# EAGLE board M3020A (EAGLE 6.6.0)
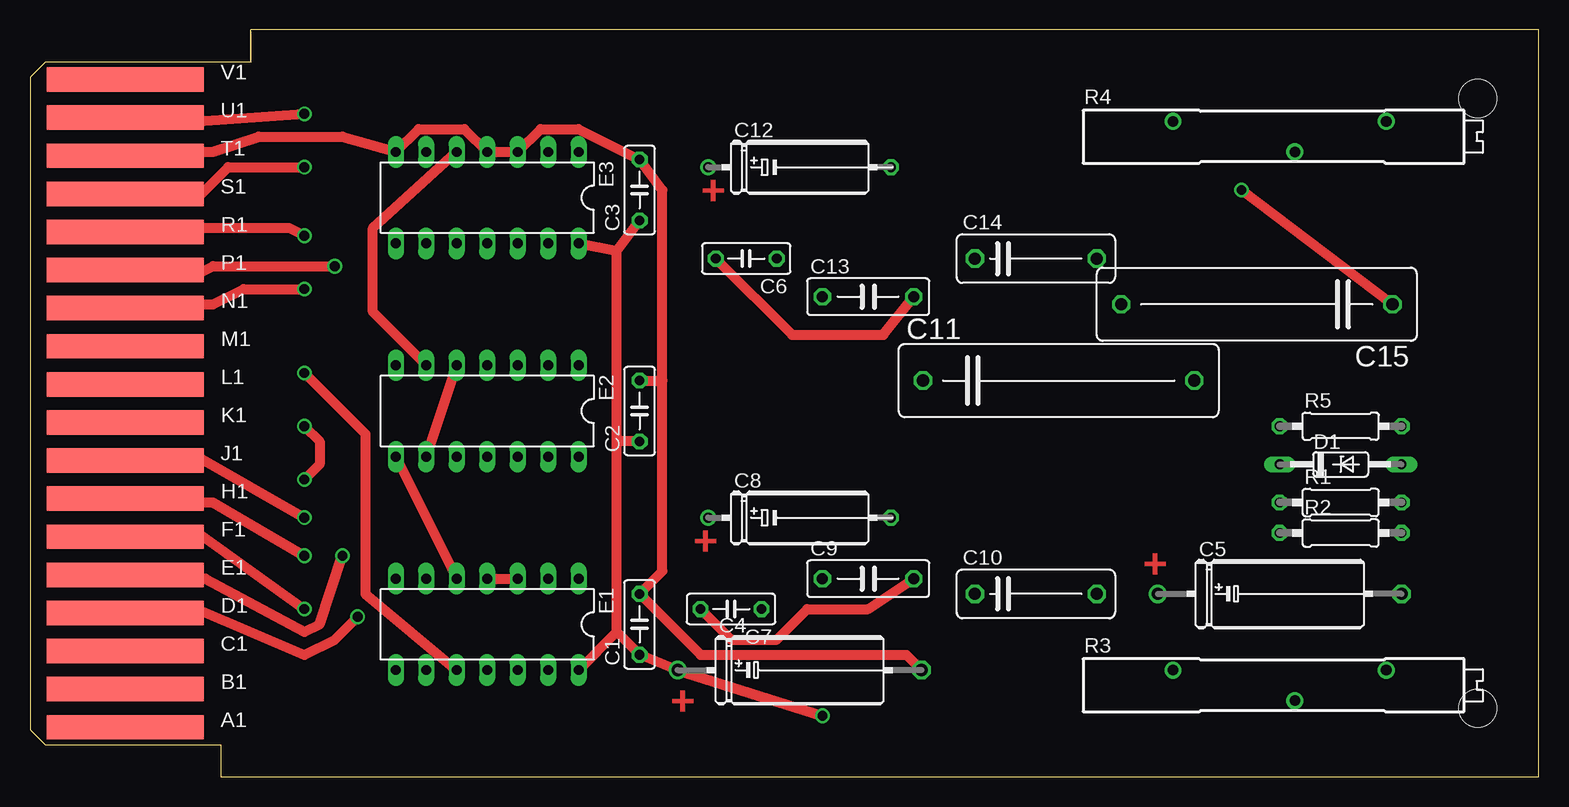
[diagram p0: board, top side]
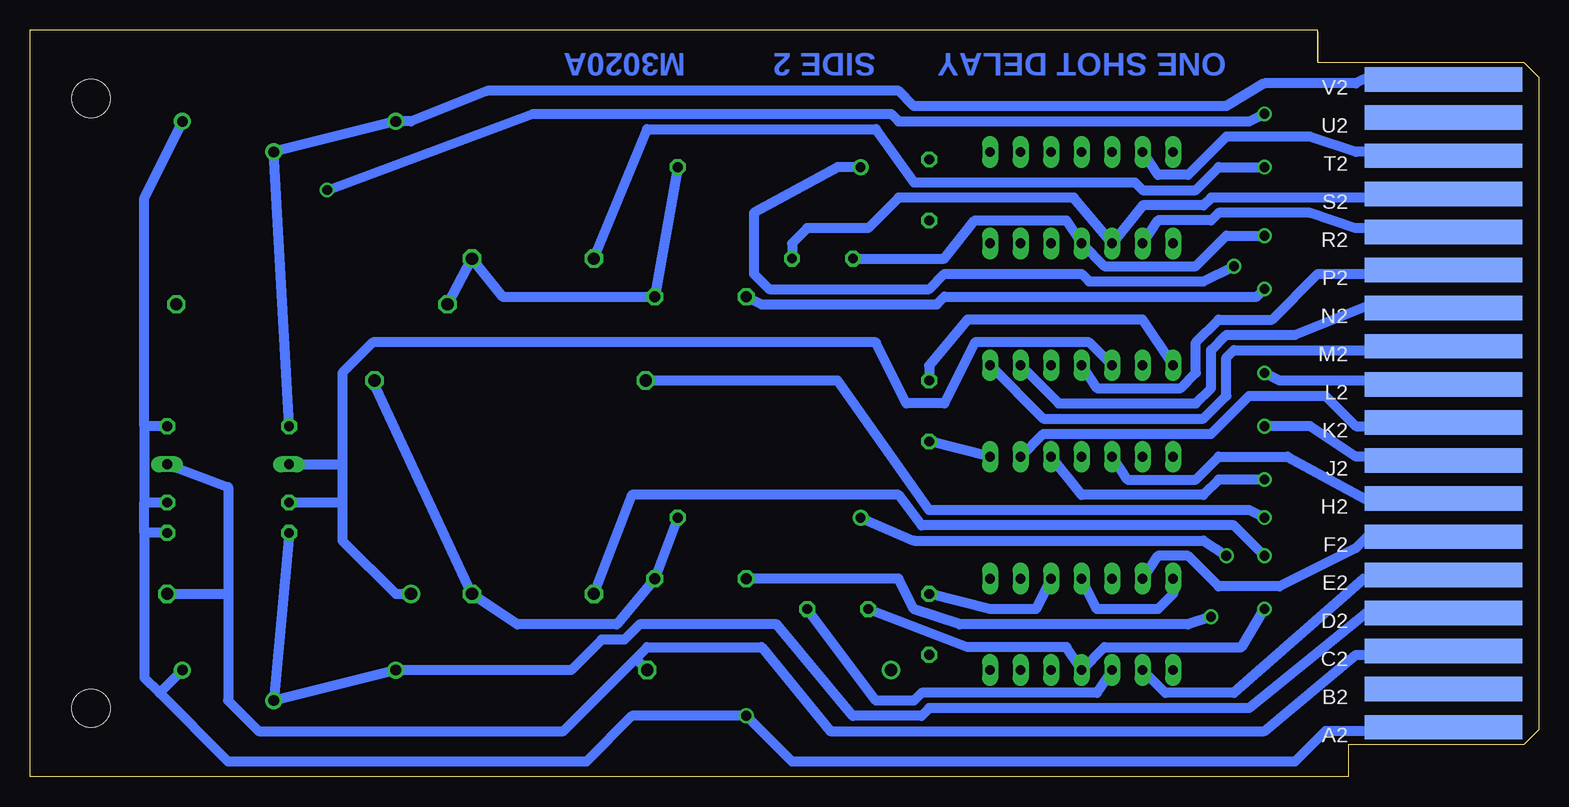
[diagram p1: board, bottom side, seen from below]

Size 125.73 x 62.23 mm. Coordinates in mm from the lower left corner, seen from the top.
Copper layers (1+16): Top 0.035mm / dielectric 1.5mm / Bottom 0.035mm
Design rules "16mils": minimum track width 16mil, minimum drill 32mil, track to track 15mil, track to pad 10mil, pad to pad 10mil, via to via 10mil, smd to smd 10mil, copper to edge 13mil, drill to drill 10mil, minimum pad ring 10mil, minimum via ring 8mil, stop-mask expansion 0mil, vias tented up to drill 0mil, thermal gap 10mil
Net classes: 0 default: width 0.813 mm

## Footprints (pad centres in the part's own frame; a part is rotated, then mirrored left to right if it is on the bottom)
C050-025X075 = drill 0.813 octagon: 1 -2.54,0; 2 2.54,0
E12-8 = drill 1.016: + -10.16,0 | drill 1.016 octagon: - 10.16,0
E15-5 = drill 0.813: + -7.62,0 | drill 0.813 octagon: - 7.62,0
C075-032X103 = drill 0.914 octagon: 1 -3.81,0; 2 3.81,0
C102-043X133 = drill 1.016 octagon: 1 -5.08,0; 2 5.08,0
C225-062X268 = drill 1.016 octagon: 1 -11.303,0; 2 11.303,0
DO35Z10 = drill 0.813 long: A 5.08,0; C -5.08,0
DIL14 = drill 0.813 long: 1 -7.62,-3.81; 2 -5.08,-3.81; 3 -2.54,-3.81; 4 0,-3.81; 5 2.54,-3.81; 6 5.08,-3.81; 7 7.62,-3.81; 8 7.62,3.81; 9 5.08,3.81; 10 2.54,3.81; 11 0,3.81; 12 -2.54,3.81; 13 -5.08,3.81; 14 -7.62,3.81
0207/10 = drill 0.813 octagon: 1 -5.08,0; 2 5.08,0
3006Y = drill 0.9: 1 -8.89,1.27; 2 1.27,-1.27; 3 8.89,1.27
SINGLE = hole 3.175: 120.65,56.515; 120.65,5.715
EDGE-CON2 = smd 13.106 x 2.032: A1 7.938,4.128; B1 7.938,7.303; C1 7.938,10.477; D1 7.938,13.652; E1 7.938,16.828; F1 7.938,20.003; H1 7.938,23.177; J1 7.938,26.352; K1 7.938,29.527; L1 7.938,32.703; M1 7.938,35.877; N1 7.938,39.053; P1 7.938,42.227; R1 7.938,45.403; S1 7.938,48.578; T1 7.938,51.752; U1 7.938,54.928; V1 7.938,58.102 | smd 13.106 x 2.032 bottom: A2 7.938,4.128; B2 7.938,7.303; C2 7.938,10.477; D2 7.938,13.652; E2 7.938,16.828; F2 7.938,20.003; H2 7.938,23.177; J2 7.938,26.352; K2 7.938,29.527; L2 7.938,32.703; M2 7.938,35.877; N2 7.938,39.053; P2 7.938,42.227; R2 7.938,45.403; S2 7.938,48.578; T2 7.938,51.752; U2 7.938,54.928; V2 7.938,58.102

## Placement (x,y rotation side)
C1  .01uF  [C050-025X075]  50.8,12.7 90 top
C2  .01uF  [C050-025X075]  50.8,30.48 90 top
C3  .01uF  [C050-025X075]  50.8,48.9 90 top
C4  47uF  [E12-8]  64.14,8.89 0 top
C5  6.8uF  [E12-8]  104.14,15.24 0 top
C6  22pF  [C050-025X075]  59.69,43.18 180 top
C7  22pF  [C050-025X075]  58.42,13.97 180 top
C8  .330uF  [E15-5]  64.14,21.59 0 top
C9  270pF  [C075-032X103]  69.85,16.51 0 top
C10  3300pF  [C102-043X133]  83.82,15.24 0 top
C11  .033uF  [C225-062X268]  85.73,33.02 0 top
C12  .330uF  [E15-5]  64.14,50.8 0 top
C13  270pF  [C075-032X103]  69.85,40.01 0 top
C14  3300pF  [C102-043X133]  83.82,43.18 0 top
C15  .033uF  [C225-062X268]  102.24,39.37 180 top
D1  1N746  [DO35Z10]  109.22,26.04 0 top
E1  74121N  [DIL14]  38.1,12.7 180 top
E2  7413N  [DIL14]  38.1,30.48 180 top
E3  74121N  [DIL14]  38.1,48.26 180 top
R1  180  [0207/10]  109.22,22.86 0 top
R2  220K  [0207/10]  109.22,20.32 0 top
R3  [3006Y]  104.14,7.62 0 top
R4  [3006Y]  104.14,53.34 0 top
R5  220K  [0207/10]  109.22,29.21 0 top
U$1  OUTLINE-SINGLE  [SINGLE]  0,0 0 top
U$2  [EDGE-CON2]  0,0 0 top

## Library data of the parts
C1-C3 C6 C7 C9-C11 C13-C15 R1 R2 R5 = rcl
C4 C5 C8 C12 R3 R4 U$1 U$2 = dec-con
D1 = diode
E1-E3 = 74xx-us

## Nets
+3V3: C5.+ D1.C E2.5 E2.9 R1.1
D1: C9.1 U$2.D1
D2: R2.1 R3.1 R3.2 U$2.D2
E1: C8.+ U$2.E1
E2: E1.9 U$2.E2
F1: C7.2 C8.- C9.2 C10.2 C11.2 E1.11 U$2.F1
F2: E1.6 U$2.F2
GND: C1.2 C2.2 C3.2 C4.- C5.- D1.A E1.3 E1.4 E1.7 E2.7 E3.3 E3.4 E3.7 U$2.C2 U$2.T1
H1: C10.1 U$2.H1
H2: E2.10 U$2.H2
J1: C11.1 U$2.J1
J2: E2.12 U$2.J2
K2: E2.13 U$2.K2
L2: C7.1 E1.10 U$2.L2
M2: E2.1 U$2.M2
N1: C13.1 U$2.N1
N2: E2.2 U$2.N2
N$4: E2.6 E3.5
N$5: E1.5 E2.8
P1: C12.+ U$2.P1
P2: E2.4 U$2.P2
R1: C6.2 C12.- C13.2 C14.2 C15.2 E3.11 U$2.R1
R2: E3.9 U$2.R2
S1: C14.1 U$2.S1
S2: C6.1 E3.10 U$2.S2
T2: E3.6 U$2.T2
U1: C15.1 U$2.U1
V2: R4.1 R4.2 R5.1 U$2.V2
VCC: C1.1 C2.1 C3.1 C4.+ E1.14 E2.14 E3.14 R1.2 R2.2 R3.3 R4.3 R5.2 U$2.A2

## Tracks (layer width: path | path; a pad name or v marks a point on that pad's centre or on a via)
+3V3
  Top 0.813: E2.9 E2.5
  Bottom 0.813: E2.5 37.47,36.2 46.99,36.2 49.53,31.11 52.71,31.11 55.25,36.2 97.16,36.2 99.7,33.66 99.7,26.04 | 99.7,26.04 99.7,22.86 | 99.7,22.86 99.7,19.68 95.25,15.24 C5.+ | R1.1 99.7,22.86 | D1.C 99.7,26.04
D1  (via drill 0.81)
  Top 0.813: U$2.D1 8.26,13.97 13.97,13.97 22.86,10.16 25.4,11.43 v27.31,13.34
  Bottom 0.813: v27.31,13.34 29.21,12.7 48.26,12.7 52.07,13.97 53.34,16.51 C9.1
D2
  Bottom 0.813: U$2.D2 8.89,13.97 13.97,13.97 24.13,5.71 50.8,5.71 51.44,5.08 57.15,5.08 63.5,12.7 74.93,12.7 76.2,11.43 78.11,11.43 80.65,8.89 R3.1 R3.2 R2.1
E1  (via drill 0.81)
  Top 0.813: U$2.E1 8.89,16.51 14.61,16.51 22.86,12.06 24.13,12.7 v26.04,18.41
  Bottom 0.813: C8.+ 52.07,19.68 27.94,19.68 v26.04,18.41
E2
  Bottom 0.813: U$2.E2 8.89,16.51 14.61,16.51 25.4,6.99 31.12,6.99 E1.9
F1  (via drill 0.81)
  Top 0.813: U$2.F1 8.89,20.32 13.97,20.32 v22.86,13.97 | C7.2 58.42,11.43 62.23,11.43 64.77,13.97 69.85,13.97 C9.2
  Bottom 0.813: v22.86,13.97 24.77,10.79 36.2,10.79 E1.11 39.37,10.79 47.63,10.79 C7.2 | C8.- C9.2 76.84,12.7 85.09,12.7 C10.2 97.16,33.02 C11.2
F2
  Bottom 0.813: U$2.F2 8.89,20.32 13.97,20.32 15.24,19.05 21.59,15.88 26.67,15.88 29.21,18.41 31.75,18.41 E1.6
GND
  Top 0.813: E1.4 E1.3 | 52.71,33.02 52.71,17.14 C1.2 55.88,10.16 72.39,10.16 73.03,10.16 C4.- | 52.71,33.02 52.71,48.9 C3.2 45.72,53.98 42.55,53.98 E3.3 E3.4 36.2,53.98 32.39,53.98 E3.7 26.04,53.34 19.05,53.34 15.24,52.07 8.89,52.07 U$2.T1 | C2.2 52.71,33.02
  Bottom 0.813: E2.7 33.02,38.1 47.63,38.1 50.8,34.29 C2.2 | E1.7 30.48,15.24 31.75,13.97 36.83,13.97 E1.4 | E1.3 41.91,13.97 45.72,13.97 C1.2 | C5.- 109.22,15.24 | 109.22,15.24 109.22,6.35 106.68,3.81 81.28,3.81 75.25,9.84 | 75.25,9.84 74.3,10.79 64.77,10.79 59.06,3.81 22.86,3.81 15.24,10.16 8.89,10.16 U$2.C2 | D1.A 109.22,24.13 109.22,15.24 | C4.- 75.25,9.84
H1  (via drill 0.81)
  Top 0.813: U$2.H1 8.89,22.86 15.24,22.86 v22.86,18.41
  Bottom 0.813: v22.86,18.41 25.4,20.95 51.44,20.95 53.34,23.5 75.57,23.5 C10.1
H2
  Bottom 0.813: E2.10 34.29,24.77 28.58,24.77 26.67,26.67 20.96,26.67 13.97,22.86 8.89,22.86 U$2.H2
J1  (via drill 0.81)
  Top 0.813: U$2.J1 8.89,26.67 13.97,26.67 v22.86,21.59
  Bottom 0.813: v22.86,21.59 24.13,22.23 50.8,22.23 58.42,33.02 C11.1
J2  (via drill 0.81)
  Top 0.813: v22.86,29.21 24.13,27.94 24.13,26.04 v22.86,24.77
  Bottom 0.813: U$2.J2 8.89,26.67 15.24,26.67 19.05,29.21 v22.86,29.21 | v22.86,24.77 26.67,24.77 27.94,23.5 38.1,23.5 E2.12
K2
  Bottom 0.813: E2.13 41.28,28.57 27.31,28.57 24.13,31.75 17.78,31.75 15.24,29.21 8.89,29.21 U$2.K2
L2  (via drill 0.81)
  Top 0.813: v22.86,33.66 27.94,28.57 27.94,15.24 E1.10
  Bottom 0.813: U$2.L2 8.26,33.02 21.59,33.02 v22.86,33.66 | E1.10 36.83,6.99 51.44,6.99 52.07,6.35 55.25,6.35 C7.1
M2
  Bottom 0.813: E2.1 41.28,29.84 27.94,29.84 26.04,31.75 26.04,34.92 25.4,35.56 8.89,35.56 U$2.M2
N1  (via drill 0.81)
  Top 0.813: U$2.N1 8.89,39.37 15.24,39.37 17.78,40.64 v22.86,40.64
  Bottom 0.813: C13.1 64.77,39.37 50.17,39.37 49.53,40.01 23.5,40.01 v22.86,40.64
N2
  Bottom 0.813: E2.2 40.01,31.11 28.58,31.11 27.31,32.38 27.31,35.56 26.04,36.83 20.32,36.83 13.97,39.37 8.89,39.37 U$2.N2
N$4
  Top 0.813: E2.6 28.58,38.73 28.58,45.72 E3.5
N$5
  Top 0.813: E2.8 E1.5
P1  (via drill 0.81)
  Top 0.813: U$2.P1 8.89,41.91 13.97,41.91 15.24,42.55 v25.4,42.55
  Bottom 0.813: C12.+ 58.42,50.8 65.41,46.99 65.41,41.91 64.14,40.64 50.8,40.64 49.53,41.91 38.1,41.91 37.47,41.27 27.94,41.27 v25.4,42.55
P2
  Bottom 0.813: E2.4 36.83,32.38 29.85,32.38 28.58,33.66 28.58,36.2 26.67,38.1 22.23,38.1 18.42,41.91 8.89,41.91 U$2.P2
R1  (via drill 0.81)
  Top 0.813: v22.86,45.09 21.59,45.72 8.89,45.72 U$2.R1 | C6.2 63.5,36.83 71.12,36.83 C13.2
  Bottom 0.813: C6.2 49.53,43.18 46.99,46.35 39.37,46.35 E3.11 36.2,42.55 28.58,42.55 26.04,45.09 v22.86,45.09 | C12.- C13.2 86.36,40.01 C14.2 C15.2
R2
  Bottom 0.813: U$2.R2 8.26,45.72 15.24,45.72 19.05,46.99 26.67,46.99 27.31,46.35 31.75,46.35 E3.9
S1  (via drill 0.81)
  Top 0.813: U$2.S1 8.89,48.26 13.97,48.26 16.51,50.8 v22.86,50.8
  Bottom 0.813: C14.1 74.3,53.98 55.25,53.98 52.07,49.53 33.66,49.53 33.02,48.9 28.58,48.9 26.67,50.8 v22.86,50.8
S2
  Bottom 0.813: U$2.S2 8.89,48.26 27.31,48.26 27.94,47.62 33.02,47.62 E3.10 38.74,48.26 53.34,48.26 55.88,45.72 60.96,45.72 62.23,44.45 C6.1
T2
  Bottom 0.813: U$2.T2 8.89,52.07 15.24,52.07 19.05,53.34 26.04,53.34 29.21,50.16 31.75,50.16 E3.6
U1  (via drill 0.81)
  Top 0.813: C15.1 v100.97,48.9 | U$2.U1 8.26,54.61 13.97,54.61 v22.86,55.24
  Bottom 0.813: v100.97,48.9 83.82,55.24 53.98,55.24 53.34,54.61 24.13,54.61 v22.86,55.24
V2
  Bottom 0.813: U$2.V2 8.89,58.42 13.97,58.42 15.24,57.78 22.86,57.78 26.04,55.88 52.07,55.88 53.34,57.15 87.63,57.15 93.98,54.61 R4.1 R4.2 R5.1
VCC  (via drill 0.81)
  Top 0.813: 48.9,12.06 C1.1 C4.+ v66.04,5.08 | 48.9,12.06 48.9,27.94 | 48.9,27.94 48.9,43.81 | 48.9,43.81 C3.1 | C2.1 48.9,27.94 | E3.14 48.9,43.81 | E1.14 48.9,12.06
  Bottom 0.813: E2.14 C2.1 | U$2.A2 10.16,3.81 17.78,3.81 20.32,1.27 62.23,1.27 v66.04,5.08 75.57,5.08 79.38,1.27 109.22,1.27 114.94,6.99 | 114.94,6.99 116.21,8.26 116.21,20.32 | R3.3 114.94,6.99 | R4.3 116.21,48.26 116.21,29.21 | R5.2 116.21,29.21 | 116.21,29.21 116.21,22.86 | 116.21,22.86 R1.2 | R2.2 116.21,20.32 | 116.21,20.32 116.21,22.86

## Text on the board
Top: + | + | + | +
Bottom: ONE SHOT DELAY | SIDE 2 | M3020A